# Altium PCB PCB.PcbDoc
Units mil, origin at the board's own origin, x right, y up, seen from the top; angles counter-clockwise.
Board outline 2260 x 1500 mil, 2 copper layers (Top Layer, Bottom Layer); 60 components, 52 nets, 254 pads, 182 vias.
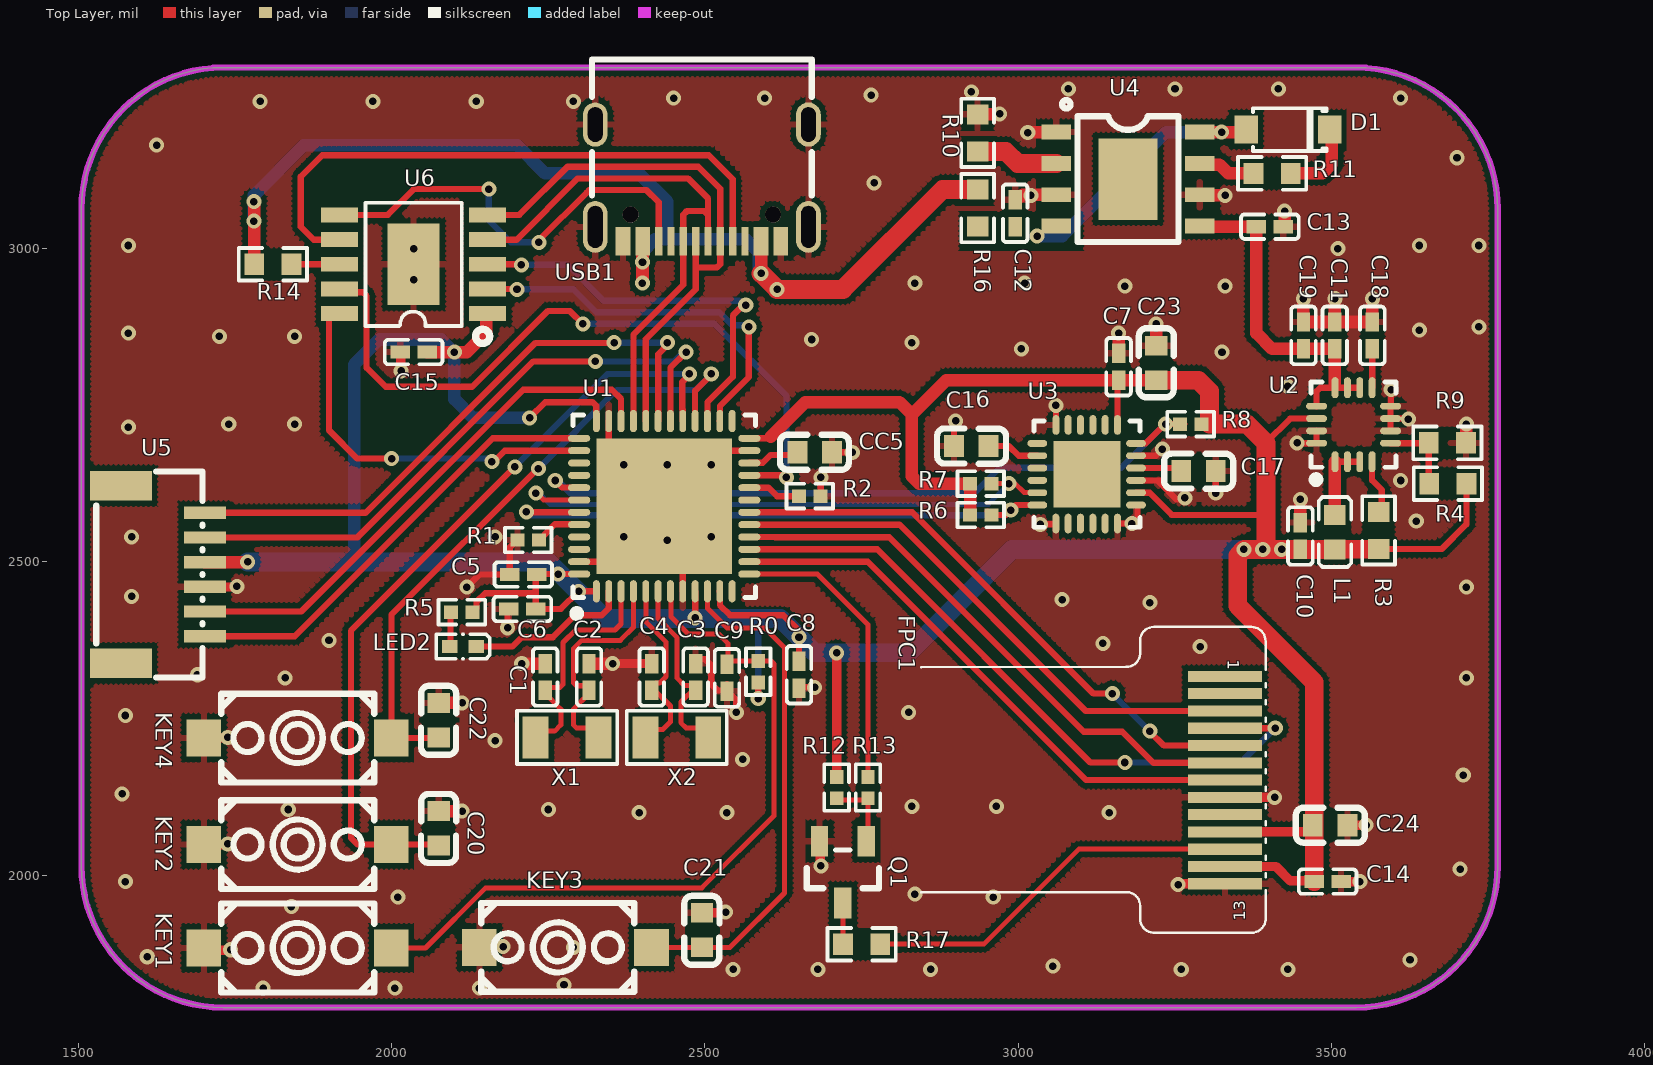
[diagram p0: Top Layer view]
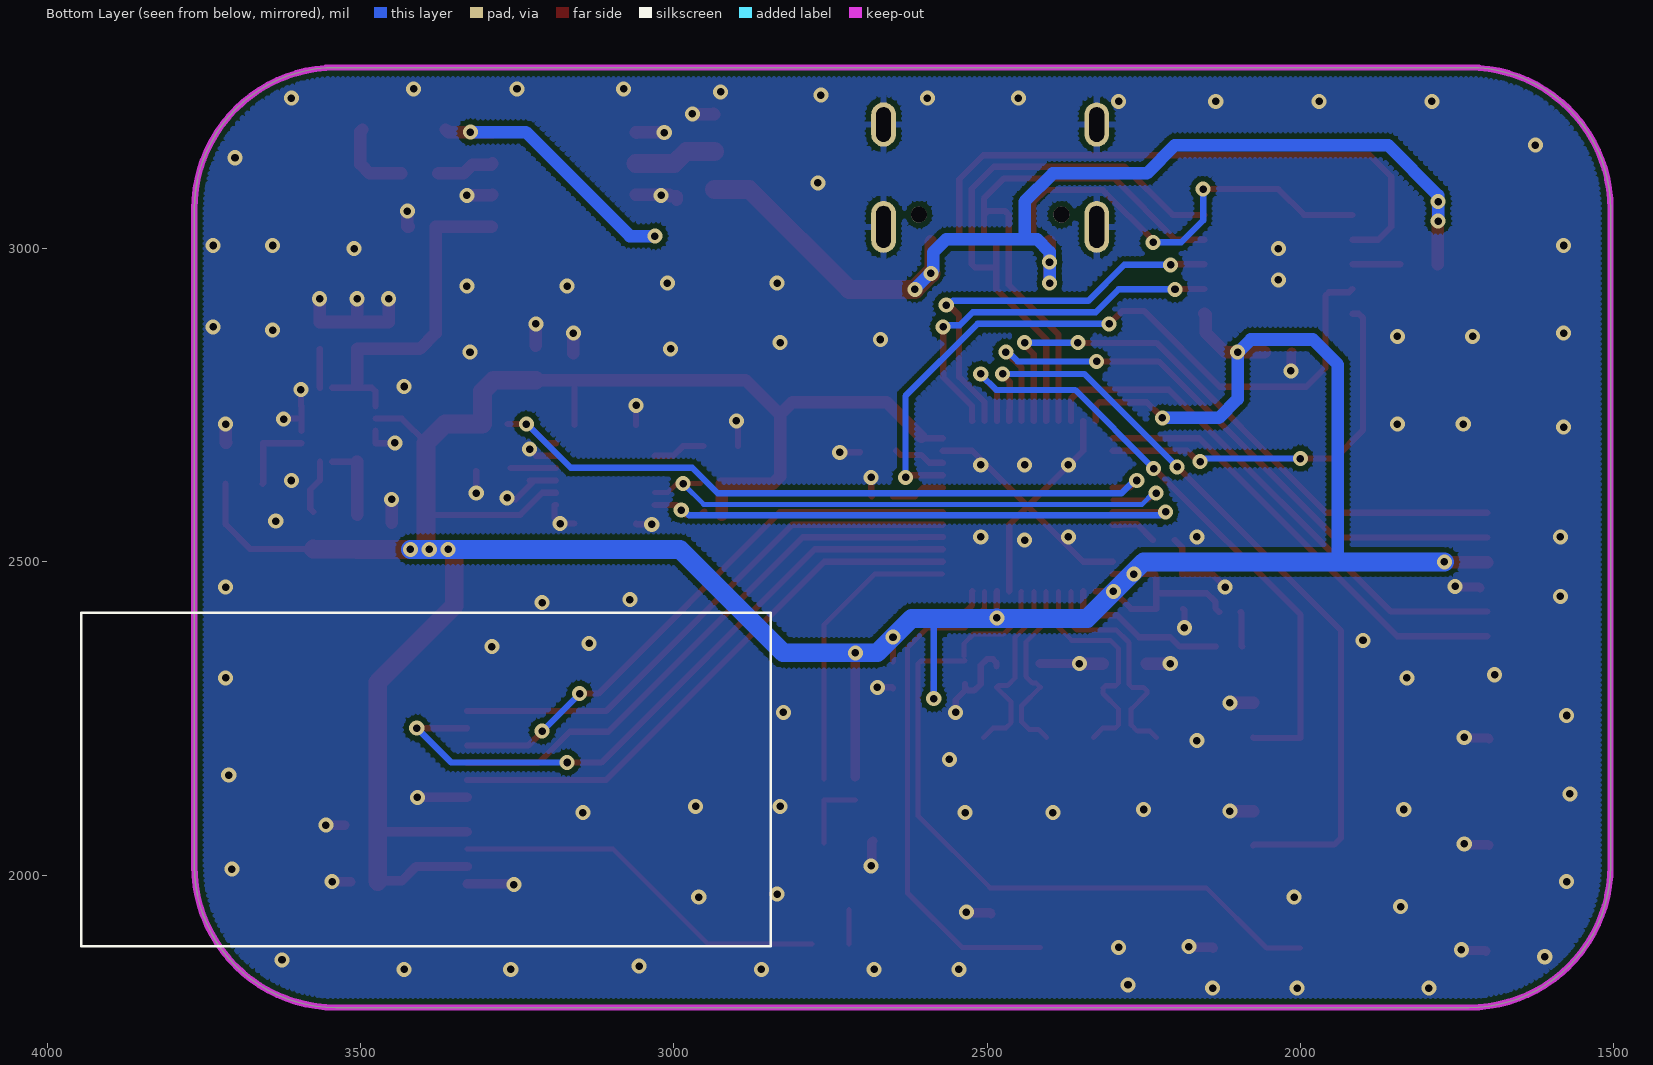
[diagram p1: Bottom Layer view, seen from below]

## Layer stack, top to bottom
Top Layer: signal copper 1.4
Dielectric: dielectric 12.6, FR-4, Dk 4.8
Bottom Layer: signal copper 1.4

## Board outline
1730.98,1789.01 cw(c1730.98,2014.99) 1505,2014.99 1505,3063.02 cw(c1730.98,3063.02) 1730.98,3289 3539.01,3289.01 cw(c3539.01,3063.02) 3765,3063.02 3765,2014.99 cw(c3539.01,2014.99) 3539.01,1789.01

## Design rules (kind name [scope] priority, off if disabled: settings)
Clearance [All] p0: scope1count=1 scope1_0_kind=Board scope1_0_value=Board scope2count=1 scope2_0_kind=Board scope2_0_value=Board commentlength=0 gap=8.5
Clearance [All] p1: gap=8.5
ComponentClearance [All] p0: scope1count=1 scope1_0_kind=Board scope1_0_value=Board scope2count=1 scope2_0_kind=Board scope2_0_value=Board commentlength=0 gap=0 collisioncheckmode=3
ComponentClearance [All] p1: gap=0 collisioncheckmode=3 verticalgap=0
DiffPairsRouting [All] p0: scope1count=1 scope1_0_kind=Board scope1_0_value=Board scope2count=1 scope2_0_kind=Board scope2_0_value=Board commentlength=0
FanoutControl Fanout_Default [All] p0: scope1count=1 scope1_0_kind=Board scope1_0_value=Board scope2count=1 scope2_0_kind=Board scope2_0_value=Board commentlength=30 // Fanout_Default (Default Rule)
FanoutControl Fanout_Small [All] p0 off: scope1count=1 scope1_0_kind=Board scope1_0_value=Board scope2count=1 scope2_0_kind=Board scope2_0_value=Board commentlength=84 // Protel DXP Scope 1 Expression Was: (CompPinCount < 5)   Fanout_Small (Default Rule)
FanoutControl Fanout_SOIC [All] p0 off: scope1count=1 scope1_0_kind=Board scope1_0_value=Board scope2count=1 scope2_0_kind=Board scope2_0_value=Board commentlength=71 // Protel DXP Scope 1 Expression Was: IsSOIC   Fanout_SOIC (Default Rule)
FanoutControl Fanout_LCC [All] p0 off: scope1count=1 scope1_0_kind=Board scope1_0_value=Board scope2count=1 scope2_0_kind=Board scope2_0_value=Board commentlength=69 // Protel DXP Scope 1 Expression Was: IsLCC   Fanout_LCC (Default Rule)
FanoutControl Fanout_BGA [All] p0 off: scope1count=1 scope1_0_kind=Board scope1_0_value=Board scope2count=1 scope2_0_kind=Board scope2_0_value=Board commentlength=69 // Protel DXP Scope 1 Expression Was: IsBGA   Fanout_BGA (Default Rule)
Height [All] p0: scope1count=1 scope1_0_kind=Board scope1_0_value=Board scope2count=1 scope2_0_kind=Board scope2_0_value=Board commentlength=0
HoleSize [All] p0: scope1count=1 scope1_0_kind=Board scope1_0_value=Board scope2count=1 scope2_0_kind=Board scope2_0_value=Board commentlength=0 absolutevalues=TRUE maxlimit=100 minlimit=1 maxpercent=80.000 minpercent=20.000
LayerPairs [All] p0: scope1count=1 scope1_0_kind=Board scope1_0_value=Board scope2count=1 scope2_0_kind=Board scope2_0_value=Board commentlength=0 enforce=TRUE
PasteMaskExpansion [All] p0: scope1count=1 scope1_0_kind=Board scope1_0_value=Board scope2count=1 scope2_0_kind=Board scope2_0_value=Board commentlength=0 expansion=0
PlaneClearance [All] p0: scope1count=1 scope1_0_kind=Board scope1_0_value=Board scope2count=1 scope2_0_kind=Board scope2_0_value=Board commentlength=0 clearance=20
PlaneConnect [All] p0: scope1count=1 scope1_0_kind=Board scope1_0_value=Board scope2count=1 scope2_0_kind=Board scope2_0_value=Board commentlength=0 planeconnectstyle=Relief reliefexpansion=20 reliefentries=4 reliefconductorwidth=10 reliefairgap=10
PolygonConnect [All] p0 off: scope1count=1 scope1_0_kind=Board scope1_0_value=Board scope2count=1 scope2_0_kind=Board scope2_0_value=Board commentlength=44 connectstyle=Direct reliefconductorwidth=10 reliefentries=4 polygonreliefangle="45 Angle" // Protel DXP Scope 1 Expression Was: ISVIA
PolygonConnect [ISVIA] p1: connectstyle=Direct reliefconductorwidth=10 reliefentries=4 polygonreliefangle="45 Angle"
RoutingCorners [All] p0: scope1count=1 scope1_0_kind=Board scope1_0_value=Board scope2count=1 scope2_0_kind=Board scope2_0_value=Board commentlength=0 cornerstyle=45-Degree minsetback=100 maxsetback=100
RoutingLayers [All] p0: scope1count=1 scope1_0_kind=Board scope1_0_value=Board scope2count=1 scope2_0_kind=Board scope2_0_value=Board commentlength=0 top layer=Automatic bottom layer=Automatic
RoutingPriority [All] p0: scope1count=1 scope1_0_kind=Board scope1_0_value=Board scope2count=1 scope2_0_kind=Board scope2_0_value=Board commentlength=0
RoutingTopology [All] p0: scope1count=1 scope1_0_kind=Board scope1_0_value=Board scope2count=1 scope2_0_kind=Board scope2_0_value=Board commentlength=0 topology=Shortest
RoutingVias [All] p0: scope1count=1 scope1_0_kind=Board scope1_0_value=Board scope2count=1 scope2_0_kind=Board scope2_0_value=Board commentlength=0 holewidth=28 width=50 viastyle="Through Hole" minholewidth=10 minwidth=10 maxholewidth=28 maxwidth=50
RoutingVias [All] p1: holewidth=28 width=50 viastyle="Through Hole" minholewidth=10 minwidth=10 maxholewidth=28 maxwidth=50
ShortCircuit [All] p0: scope1count=1 scope1_0_kind=Board scope1_0_value=Board scope2count=1 scope2_0_kind=Board scope2_0_value=Board commentlength=0 allowed=FALSE
SolderMaskExpansion [All] p0: scope1count=1 scope1_0_kind=Board scope1_0_value=Board scope2count=1 scope2_0_kind=Board scope2_0_value=Board commentlength=0 expansion=4
SolderMaskExpansion [All] p1: expansion=4
TestPointUsage FabricationTestPointUsage [All] p0: scope1count=1 scope1_0_kind=Board scope1_0_value=Board scope2count=1 scope2_0_kind=Board scope2_0_value=Board commentlength=0 valid=0 allowmultiple=FALSE
TestPointUsage FabricationTestPointUsage [All] p1: valid=0 allowmultiple=FALSE
Testpoint FabricationTestpoint [All] p0: scope1count=1 scope1_0_kind=Board scope1_0_value=Board scope2count=1 scope2_0_kind=Board scope2_0_value=Board commentlength=0 side=3 testpointundercomponent=TRUE minsize=40 maxsize=100 preferedsize=60 minholesize=0 maxholesize=40 preferedholesize=32 testpointgrid=1 style=297 order=0123456789
Testpoint FabricationTestpoint [All] p1: side=3 testpointundercomponent=TRUE minsize=40 maxsize=100 preferedsize=60 minholesize=0 maxholesize=40 preferedholesize=32 testpointgrid=1 style=297 order=0123456789
UnRoutedNet [All] p0: scope1count=1 scope1_0_kind=Board scope1_0_value=Board scope2count=1 scope2_0_kind=Board scope2_0_value=Board commentlength=0
Width [All] p0: scope1count=1 scope1_0_kind=Board scope1_0_value=Board scope2count=1 scope2_0_kind=Board scope2_0_value=Board commentlength=0 maxlimit=80 minlimit=8 preferedwidth=10
Width [All] p1: maxlimit=80 minlimit=8 preferedwidth=10
18 further rules are at their usual default settings.

## Components (designator, comment, footprint, x,y, rotation, side; value= is the part's Value field where it differs from the comment)
C1 "15pf" C0402 2245,2316.46 r90 top
C2 "15pf" C0402 2315,2316.46 r270 top
C3 "8pf" C0402 2485,2316.46 r270 top
C4 "8pf" C0402 2415,2316.46 r90 top
C5 "100NF" C0402 2210,2480 r180 top
C6 "100NF" C0402 2208.54,2425 r180 top
C7 "1UF" C0402 3160,2811.46 r90 top
C8 "10UF" C0402 2650,2320 r270 top
C9 "1UF" C0402 2535,2315 r270 top
C10 "22u" C0402 3450,2541.46 r90 top
C11 "0.1u" C0402 3505,2861.46 r90 top
C12 "10u" C0402 2995,3056.46 r270 top
C13 "10u" C0402 3401.46,3035 r180 top
C14 "1u" C0402 3493.54,1990 r0 top
C15 "1u" C0402 2035,2835 r0 top
C16 "2.2UF" C0603 2925,2685 r180 top
C17 "100NF" C0603 3287.45,2645 r180 top
C18 "3.3nf" C0402 3565,2861.46 r270 top
C19 "10u" C0402 3455,2861.46 r90 top
C20 "0.1u" C0603 2075,2075 r90 top
C21 "0.1u" C0603 2495,1912.56 r90 top
C22 "0.1u" C0603 2075,2247.55 r90 top
C23 "1NF" C0603 3220,2817.55 r270 top
C24 "1NF" C0603 3497.55,2080 r180 top
CC5 "4.7UF" C0603 2675,2675 r0 top
D1 "1N4007W" SOD-123_L2.8-W1.8-LS3.7-RD 3430,3190 r180 top
FPC1 "0.96-LCD-13PIN" 0.96LCD-13PIN 2845,2419.01 r270 top
KEY1 "K2-3.6×6.1_SMD" KEY-SMD_2P-L6.2-W3.6-LS8.0#1 1850,1884.01 r0 top
KEY2 "K2-3.6×6.1_SMD" KEY-SMD_2P-L6.2-W3.6-LS8.0#1 1850,2049.01 r180 top
KEY3 "K2-3.6×6.1_SMD" KEY-SMD_2P-L6.2-W3.6-LS8.0#2 2265,1885 r180 top
KEY4 "K2-3.6×6.1_SMD" KEY-SMD_2P-L6.2-W3.6-LS8.0#1 1850,2219.01 r180 top
L1 "1/2.2uh" L0603 3504.99,2547.45 r270 top
LED2 "SZYY0402B" LED0402-RD_BLUE 2113.81,2365 r180 top
Q1 "S8050" SOT-23-3_L2.9-W1.3-P1.90-LS2.4-TR 2720,2005 r90 top
R0 "10K" R0402 2585,2325 r90 top
R1 "10K" R0402 2217.96,2535 r180 top
R2 "10K" R0402 2667.04,2605 r0 top
R3 "100k" R0603 3575,2550.34 r90 top
R4 "125k" R0603 3685.34,2625 r0 top
R5 "10K" R0402 2112.04,2420 r180 top
R6 "10k" R0402 2940,2575 r0 top
R7 "10k" R0402 2940,2625 r0 top
R8 "10k" R0402 3275,2720 r180 top
R9 "40k" R0603 3684.66,2690 r180 top
R10 "1.1k" R0603 2935,3184.66 r90 top
R11 "1k" R0603 3405,3120 r180 top
R12 "10k" R0402 2710,2140 r90 top
R13 "1k" R0402 2760,2140 r270 top
R14 "10k" R0603 1810.35,2975 r180 top
R16 "0.4" R0603 2935,3064.66 r270 top
R17 "1k" R0603 2750,1890 r0 top
U1 "STM32F401CCU6" UFQFPN-48_L7.0-W7.0-P0.50-BL-EP 2435,2589.01 r0 top
U2 "TPS62130RGTR" QFN-16_L3.0-W3.0-P0.50-TL-EP1.7 3535,2719.01 r90 top
U3 "MPU-6050_C24112" QFN-24_L4.0-W4.0-P0.50-BL-EP2.7 3109.04,2639.99 r0 top
U4 "TP4056" ESOP-8_L4.9-W3.9-P1.27-LS6.0-BL-EP 3175,3110.99 r270 top
U5 "ZX-SH1.0-6PWT" CONN-SMD_6P-P1.00_MEGASTAR_ZX-SH1.0-6PWT 1635,2480 r270 top
U6 "CH224K_C9900042655" ESSOP-10_L4.9-W3.9-P1.00-LS6.0-BL-EP 2035,2975 r90 top
USB1 "TYPE-C16PIN" USB-C-SMD_TYPE-C16PIN 2495,3105 r180 top
X1 "32.768kHz" OSC-SMD_L3.2-W1.5 2280,2220 r0 top
X2 "25MHz" OSC-SMD_L3.2-W1.5 2455,2220 r0 top

## Footprints (in the part's own frame and the unit in brackets; to place one, negate y for a bottom-side part, rotate by r counter-clockwise, add the part's x,y. Pads: shape width x height; smd on the part's side, far side on the other; paste and mask are expansions set on the pad)
0.96LCD-13PIN [mm]
  rect 0.45x3 smd: 1(2.582,12.311) 2(3.282,12.311) 3(3.983,12.311) 4(4.683,12.311) 5(5.384,12.311) 6(6.084,12.311) 7(6.784,12.311) 8(7.485,12.311) 9(8.185,12.311) 10(8.886,12.311) 11(9.586,12.311) 12(10.286,12.311) 13(10.987,12.311)
  silkscreen extent 0.57,0 12.97,13.96
C0402 [mm]
  rect 0.79x0.54 smd: 1(-0.545,0) 2(0.545,0)
  silkscreen extent -1.17,-0.5 1.17,0.5
C0603 [mm]
  rect 0.8x0.9 smd: 1(-0.7,0) 2(0.7,0)
  silkscreen extent -1.41,-0.71 1.39,0.72
CONN-SMD_6P-P1.00_MEGASTAR_ZX-SH1.0-6PWT [mm]
  rect 0.5x1.7 smd: 1(-2.5,1.7) 2(-1.5,1.7) 3(-0.5,1.7) 4(0.5,1.7) 5(1.5,1.7) 6(2.5,1.7)
  rect 1.2x2.5 smd: 7(3.6,-1.7) 8(-3.6,-1.7)
  silkscreen extent -4.17,-2.7 4.18,1.6
ESOP-8_L4.9-W3.9-P1.27-LS6.0-BL-EP [mm]
  rect 0.6x1.2 smd: 1(-1.905,-2.908) 2(-0.635,-2.908) 3(0.635,-2.908) 4(1.905,-2.908) 5(1.905,2.908) 6(0.635,2.908) 7(-0.635,2.908) 8(-1.905,2.908)
  rect 3.3x2.4 smd: 9(0,0)
  silkscreen extent -3.2,-2.67 2.55,2.05
ESSOP-10_L4.9-W3.9-P1.00-LS6.0-BL-EP [mm]
  rect 0.6x1.5 smd: 1(-2,-3) 2(-1,-3) 3(0,-3) 4(1,-3) 5(2,-3) 6(2,3) 7(1,3) 8(0,3) 9(-1,3) 10(-2,3)
  rect 3.3x2.1 smd: 11(0,0)
  silkscreen extent -3.2,-3.08 2.5,1.95
KEY-SMD_2P-L6.2-W3.6-LS8.0#1 [mm]
  rect 1.4x1.5 smd: 1(-3.8,0) 2(3.8,0)
  silkscreen extent -3.1,-1.8 3.1,1.8
KEY-SMD_2P-L6.2-W3.6-LS8.0#2 [mm]
  rect 1.4x1.5 smd: 1(-3.8,0) 2(3.175,0)
  silkscreen extent -3.1,-1.8 3.1,1.8
L0603 [mm]
  rect 0.8x0.864 smd: 1(-0.7,0) 2(0.7,0)
  silkscreen extent -1.42,-0.65 1.41,0.67
LED0402-RD_BLUE [mm]
  rect 0.636x0.54 smd: 1(-0.538,0) 2(0.538,0)
  silkscreen extent -1.09,-0.54 1.09,0.54
OSC-SMD_L3.2-W1.5 [mm]
  rect 1.05x1.7 smd: 1(-1.275,0) 2(1.275,0)
  silkscreen extent -2.03,-1.08 2.03,1.08
QFN-16_L3.0-W3.0-P0.50-TL-EP1.7 [mm]
  oval 0.85x0.28 smd: 1(-1.5,0.75) 2(-1.5,0.25) 3(-1.5,-0.25) 4(-1.5,-0.75) 9(1.5,-0.75) 10(1.5,-0.25) 11(1.5,0.25) 12(1.5,0.75)
  oval 0.28x0.85 smd: 5(-0.75,-1.5) 6(-0.25,-1.5) 7(0.25,-1.5) 8(0.75,-1.5) 13(0.75,1.5) 14(0.25,1.5) 15(-0.25,1.5) 16(-0.75,1.5)
  silkscreen extent -2.38,-1.72 1.72,1.73
QFN-24_L4.0-W4.0-P0.50-BL-EP2.7 [mm]
  oval 0.28x0.8 smd: 1(-1.25,-2) 2(-0.75,-2) 3(-0.25,-2) 4(0.25,-2) 5(0.75,-2) 6(1.25,-2) 13(1.25,2) 14(0.75,2) 15(0.25,2) 16(-0.25,2) 17(-0.75,2) 18(-1.242,2)
  oval 0.8x0.28 smd: 7(2,-1.25) 8(2,-0.75) 9(2,-0.25) 10(2,0.25) 11(2,0.75) 12(2,1.25) 19(-2,1.25) 20(-2,0.75) 21(-2,0.25) 22(-2,-0.25) 23(-2,-0.75) 24(-2,-1.25)
  rect 2.7x2.7 smd: 25(0.012,0)
  silkscreen extent -2.14,-2.15 2.16,2.15
R0402 [mm]
  rect 0.566x0.54 smd: 1(-0.433,0) 2(0.433,0)
  silkscreen extent -0.94,-0.5 0.94,0.5
R0603 [mil]
  rect 31.75x34.02 smd: 1(-29.65,0) 2(29.66,0)
  silkscreen extent -55,-26 55,26
SOD-123_L2.8-W1.8-LS3.7-RD [mm]
  rect 0.95x1.15 smd: 1(-1.693,0) 2(1.693,0)
  silkscreen extent -1.58,-0.87 1.41,0.87
SOT-23-3_L2.9-W1.3-P1.90-LS2.4-TR [mm]
  rect 1.25x0.7 smd: 1(1.25,0.95) 2(1.25,-0.95) 3(-1.25,0)
  silkscreen extent -0.65,-1.46 0.9,1.46
UFQFPN-48_L7.0-W7.0-P0.50-BL-EP [mm]
  oval 0.28x0.9 smd: 1(-2.751,-3.449) 2(-2.25,-3.449) 3(-1.75,-3.449) 4(-1.25,-3.449) 5(-0.749,-3.449) 6(-0.249,-3.449) 7(0.249,-3.449) 8(0.749,-3.449) 9(1.25,-3.449) 10(1.75,-3.449) 11(2.251,-3.449) 12(2.751,-3.449) 25(2.751,3.449) 26(2.251,3.449) 27(1.75,3.449) 28(1.25,3.449) 29(0.749,3.449) 30(0.249,3.449) 31(-0.249,3.449) 32(-0.749,3.449) 33(-1.25,3.449) 34(-1.75,3.449) 35(-2.25,3.449) 36(-2.751,3.449)
  oval 0.9x0.28 smd: 13(3.449,-2.751) 14(3.449,-2.25) 15(3.449,-1.75) 16(3.449,-1.25) 17(3.449,-0.749) 18(3.449,-0.249) 19(3.449,0.249) 20(3.449,0.749) 21(3.449,1.25) 22(3.449,1.75) 23(3.449,2.25) 24(3.449,2.751) 37(-3.449,2.751) 38(-3.449,2.25) 39(-3.449,1.75) 40(-3.449,1.25) 41(-3.449,0.749) 42(-3.449,0.249) 43(-3.449,-0.249) 44(-3.449,-0.749) 45(-3.449,-1.25) 46(-3.449,-1.75) 47(-3.449,-2.25) 48(-3.449,-2.751)
  rect 5.5x5.5 smd: 49(0,0)
  silkscreen extent -3.7,-4.5 3.7,3.7
USB-C-SMD_TYPE-C16PIN [mm]
  oval 1x2.1 hole 0.6 slot 1.7 at 90 deg: 1(-4.32,1.787) 2(4.32,1.787)
  oval 1x1.8 hole 0.6 slot 1.4 at 90 deg: 3(-4.32,-2.362) 4(4.32,-2.362)
  rect 0.6x1.15 smd: A1B12(-3.2,2.362) A4B9(-2.4,2.362) B1A12(3.2,2.362) B4A9(2.4,2.362)
  rect 0.3x1.15 smd: A5(-1.25,2.362) A6(-0.25,2.362) A7(0.25,2.362) A8(-1.75,2.362) B5(1.75,2.362) B6(0.75,2.362) B7(-0.75,2.362) B8(1.25,2.362)
  round 0.65 hole 0.65 unplated: ""(-2.89,1.288) ""(2.89,1.288)
  silkscreen extent -4.45,-5 4.45,0.52

## Via types
v1: diameter 24, hole 12, Top Layer to Bottom Layer, tented both sides, 182 vias

## Nets (pads, with @x,y where several pads share a name; then routed paths per layer and width w, separated by ;. In a path a pad name is that pad's centre, name@x,y a point inside that pad or via, vN(x,y) a via of type N, cw(c..) or ccw(c..) an arc to the next point about the centre after c; other vN are vias at no path point)
3.3V: C5.1 C6.1 C7.1 C8.1 C10.1 C14.1 C15.2 C23.2 C24.2 FPC1.10 FPC1.12 L1.2 R0.1 R3.1 R4.2 R5.1 R6.1 R7.1 R8.1 R12.2 U1.1 U1.9 U1.11 U1.24 U1.36 U1.48 U2.14 U3.8 U3.13 U5.3 U6.1 | length 6913.7
  Top Layer w10: R5.1 2129.59,2420 2135.22,2425.63 2135.22,2436.09 2149.13,2450 2230,2450 ; v1(2220,2730) 2245,2755 2320.65,2755 2326.51,2749.14 2326.51,2725 U1.36 ; C5.1 2232.17,2480.71 v1(2265.69,2480.71) U1.48 ; C5.1@2235,2480 2230,2475 2230,2450 ; U1.1 v1(2298.2,2453.2) 2270,2425 C6.1 2230,2450 ; U1.9 2484.4,2453.01 v1(2484.4,2410.6) ; U1.11 2523.8,2453.01 2523.8,2431.2 2540,2415 2625,2415 v1@2650,2390 ; U1.24 2602.31,2697.31 2605,2700 ; v1(2585,2282.04) R0.1 ; C8.1 v1(2650,2380) ; U3.13 3158.26,2788.26 C7.1 ; U3.8 3187.98,2610.27 3209.73,2610.27 3245,2575 3395,2575 ; 3395,2690 3433.85,2728.85 U2.14 ; R3.1 3675.69,2520.69 3715,2560 R4.2
  Top Layer w15: R12.2 v1(2710,2355) ; FPC1.12 3410.97,2014.03 3434.03,1990.97 3471.11,1990.97 C14.1 ; FPC1.10 3461.15,2069.18 3471.97,2080 C24.2@3472.08,2080
  Top Layer w20: U5.3 1702.09,2499.84 1769.84,2499.84 v1(1770,2500) ; C15.2 v1(2100,2835) 2120,2835 2151.16,2866.16 2151.16,2894.45 2152.98,2896.26 U6.1 ; 2605,2700 2660,2755 2810,2755 2830,2735 ; R6.1 R7.1 2841.72,2625 2830,2636.72 2830,2735 ; C23.2 C7.1 2885,2790 2830,2735
  Top Layer w30: C23.2 3287.43,2790 3305,2772.43 3305,2720 3365,2720 3395,2690 3395,2575 3395,2525 v1(3390,2520) ; C10.1@3454.37,2519.95 3504.95,2519.95 L1.2 ; C14.1 3472.08,2080 3472.08,2307.92 3350,2430 3350,2510 v1(3360,2520) v1(3390,2520) ; R3.1 3574.66,2520.34 3450.34,2520.34 C10.1 v1(3390,2520)
  Bottom Layer w10: v1@2585,2290 2585,2405 2590,2410
  Bottom Layer w20: 1940,2500 1940,2815 1980,2855 2078.92,2855 2098.92,2835 v1(2100,2835) 2100,2760 2130,2730 v1(2220,2730)
  Bottom Layer w30: v1(1770,2500) 1940,2500 2250,2500 2340,2410 2483.81,2410 v1(2484.4,2410.6) 2485,2410 2590,2410 2620,2410 2675,2355 v1(2710,2355) 2825,2355 2990,2520 v1(3420,2520)
3.7V: C11.1 C13.2 C19.1 U2.10 U2.11 U2.12 U2.13 U4.5 | length 545
  Top Layer w10: U2.13 3475.94,2772.21 3481.8,2778.07 U2.11 U2.10
  Top Layer w20: U4.5@3290.49,3035 C13.2 3380,2865 3405,2840 C19.1 C11.1 3505.23,2839.77 U2.12@3505.23,2785
BOOT0: R1.1 U1.44 | length 74.8
  Top Layer w10: R1.1 2235.51,2535 2260.51,2560 2286.23,2560 2286.73,2559.51 U1.44
BOOT1: R2.1 U1.20 | length 84.8
  Top Layer w10: U1.20 2601.49,2618.51 2615,2605 R2.1
C12_2: C12.2 D1.2 R16.2 U4.4 U4.8 | length 438.7
  Top Layer w20: U4.8 v1(3324.43,3185.99) 3359.36,3185.99 D1.2
  Bottom Layer w20: v1(3030,3020) 3070,3020 3235.99,3185.99 v1(3324.43,3185.99)
CC1: U6.7 USB1.A5 | length 968.4
  Top Layer w10: U6.7 1875.63,3014.37 1855,3035 1855,3115 1889.07,3149.07 2505.93,3149.07 2544.22,3110.78 USB1.A5
CC2: U6.6 USB1.B5 | length 697.4
  Top Layer w10: U6.6 1993.74,3053.74 2035,3095 v1(2155,3095) ; v1(2235,3010) 2235,3013.29 2311.17,3089.46 2315.28,3093.57 2406.43,3093.57 2426.11,3073.89 USB1.B5
  Bottom Layer w10: v1(2155,3095) 2155,3045 2190,3010 v1(2235,3010)
CFG1: U1.21 U6.9 | length 1141.6
  Top Layer w10: U6.9 1922.19,2930.33 1954.14,2930.33 1960,2924.47 1960,2810 1990.5,2779.5 2128.34,2779.5 2249.34,2900.5 2284.5,2900.5 v1(2305,2880) ; U1.21 2623,2638.21 2626.21,2635 v1(2630,2635)
  Bottom Layer w10: v1(2305,2880) 2515,2880 2630,2765 v1(2630,2635)
CFG2: U1.26 U6.2 | length 610.5
  Top Layer w10: U6.2 v1@2199.37,2935.63 ; U1.26 2523.8,2725 2523.8,2748.8 2570,2795 v1(2570,2875)
  Bottom Layer w10: v1(2200,2935) 2290,2935 2326.5,2898.5 2522.66,2898.5 2543.48,2877.68 2567.32,2877.68 v1(2570,2875)
CFG3: U1.27 U6.3 | length 649.3
  Top Layer w10: U6.3 v1@2205,2975 ; U1.27 2503.91,2755.07 2544.5,2795.66 2544.5,2893.29 2561.21,2910 v1(2565,2910)
  Bottom Layer w10: v1(2206.85,2974.09) 2280.91,2974.09 2338,2917 2554.21,2917 2561.21,2910 v1(2565,2910)
D1_1: D1.1 R11.1 | length 128
  Top Layer w20: R11.1 3485,3120 3500,3135 3500,3186.63 D1.1
GND: C1.2 C2.1 C3.1 C4.2 C5.2 C6.2 C7.2 C8.2 C9.2 C10.2 C11.2 C12.1 C13.1 C14.2 C15.1 C16.2 C17.1 C18.1 C19.2 C20.2 C21.2 C22.2 C23.1 C24.1 CC5.2 FPC1.8 FPC1.13 KEY1.1 KEY2.2 KEY3.2 KEY4.2 Q1.1 R1.2 R2.2 R9.1 R10.2 U1.8 U1.23 U1.35 U1.47 U1.49 U2.6 U2.7 U2.8 U2.15 U2.16 U3.1 U3.6 U3.7 U3.9 U3.11 U3.18 U4.1 U4.3 U4.6 U5.4 U6.11 USB1.1 USB1.2 USB1.3 USB1.4 USB1.A1B12 USB1.B1A12 | length 2863.4
  Top Layer w10: v1(2120,2460) 2140,2480 C5.2 2188.54,2523.13 2200.41,2535 R1.2 ; v1(2185,2395) 2185,2422.92 C6.2 ; U1.47 2346.41,2500.41 U1.49 ; U1.35 2346.41,2677.61 U1.49 ; U1.8 2464.51,2559.51 U1.49 ; C3.1@2485,2332.99 C3.1 2485,2339.37 2490.63,2345 2500,2345 2510,2335 2510,2305 2520,2295 2530,2295 C9.2@2535,2300 ; C9.2@2535,2304.92 C9.2@2535,2300 ; v1(2550,2260) 2550,2280.08 2535,2295.08 C9.2@2535,2300 ; U1.23 2523.61,2677.61 U1.49 ; C8.2 2651.46,2300 v1(2675,2300) ; R2.2 2684.54,2605.46 2684.54,2634.54 v1(2685,2635) ; CC5.2 v1(2735,2675) ; C16.2 2897.45,2722.45 v1(2900,2725) ; v1(3035,2560) 3059.37,2560 3059.84,2560.47 U3.1 ; v1(3060,2750) 3060.15,2749.85 U3.18 ; U3.6 v1(3181.25,2561.25) 3190,2570 3190,2590.32 3189.53,2590.79 U3.7 ; U3.9 3221.83,2630.16 ; U3.11 3219.53,2669.53 v1(3230,2680) ; 3229.84,2630.16 3221.83,2630.16 ; v1@3265,2600 3251.98,2600 3221.83,2630.16 ; v1(3315,2610) C17.1 ; v1(3445,2690) 3445.52,2689.48 U2.16 U2.15 ; U2.6 U2.7 ; v1(3595,2775) 3594.52,2774.52 3594.52,2749.01 3594.05,2748.54 U2.7 ; v1@3621.15,2728.85 U2.7
  Top Layer w15: KEY2.2@1699.2,2047.81 KEY2.2 1737.2,2049.01 v1(1738.4,2050.21) ; KEY4.2@1699.2,2217.81 KEY4.2 1737.2,2219.01 v1(1738.4,2220.21) ; KEY1.1@1703.8,1878.8 1705,1880 1741.8,1880 v1(1743,1881.2) ; U5.4@1713.8,2458.8 1715,2460 1751.8,2460 v1(1753,2461.2) ; C15.1@2013.8,2835 2013.8,2834.74 2014.27,2834.27 2014.27,2805.73 v1(2015,2805) ; KEY3.2@2138.8,1883.8 KEY3.2 2176.8,1885 v1(2178,1886.2) ; v1(2352.45,2337.92) C4.2 ; C21.2@2493.8,1938.91 C21.2 2531.8,1940.11 v1(2533,1941.31) ; Q1.1 2683.8,2053 2683.8,2016.2 v1(2685,2015) ; v1(3255,1985) 3256.46,1986.46 FPC1.13 ; FPC1.8 v1@3409.33,2124.33 ; C14.2 v1(3545,1990) ; C24.1 v1(3555,2080)
  Top Layer w20: C20.2 v1(2112.45,2102.55) ; C22.2 v1(2112.45,2275.11) ; v1(2207.55,2337.92) C1.2 ; C2.1 v1(2352.45,2337.92) ; R10.2 R10.2@2935.34,3214.66 ; R10.2@2935.69,3215 R10.2@2935.34,3214.66 ; v1(2970,3215) 2969.66,3214.66 R10.2@2935.34,3214.66 ; C12.1 2995,3082.84 2995.63,3083.47 3004.82,3083.47 3007.35,3085.99 U4.3 ; v1(3015,3185) 3015.5,3185.5 U4.1@3060,3185.5 ; U4.1@3059.51,3185 U4.1@3060,3185.5 ; U4.1 U4.1@3060,3185.5 ; C7.2 v1(3160,2865) ; C23.1 v1@3220,2875 ; U4.6 3289.99,3085.5 3329.5,3085.5 v1(3330,3085) ; C13.1 3424.37,3035 3425,3035.63 v1(3425,3060) ; C10.2 v1(3450,2600) ; v1(3455,2920) C19.2 C11.2 ; v1(3505,2920) C11.2 ; v1(3565,2920) C18.1 C11.2 ; R9.1 3714.66,2690.34 3714.66,2719.66 v1(3715,2720)
  other v1: 1795,1820 2005,1820 2140,1820 2275,1825 2545,1850 2680,1850 2860,1850 3260,1850 3430,1850 3055,1855 3625,1865 1610,1870 2290,1885 1840,1950 2010,1965 2960,1965 2835,1970 1575,1990 3705,2010 2395,2100 2535,2100 3145,2100 1835,2105 2250,2105 2830,2110 2965,2110 3409.13,2124.16 1570,2130 3710,2160 2560,2185 2165,2215 1575,2255 2825,2260 1830,2315 3715,2315 1690,2320 3290,2365 3135,2370 1900,2375 3210,2435 3070,2440 1585,2445 3715,2460 2440,2535 1585,2540 2165,2540 2370,2540 2510,2540 3635,2565 3265.68,2602.27 3610,2630 2370,2655 2440,2655 2510,2655 1580,2715 1740,2720 1845,2720 3622.43,2728.1 3430,2780 3325,2835 3005,2840 2830,2850 2670,2855 1725,2860 1845,2860 1580,2865 3640,2870 3735,2875 3220,2880 3170,2940 3330,2940 2835,2945 3010,2945 2035,2950 2035,3000 3510,3000 1580,3005 3640,3005 3735,3005 3020,3085 2770,3105 3700,3145 1625,3165 1790,3235 1970,3235 2135,3235 2290,3235 2450,3240 2595,3240 3610,3240 2765,3245 2925,3250 3080,3255 3250,3255 3415,3255
KEY_1: C20.1 KEY2.1 U1.29 | length 1265.1
  Top Layer w10: C20.1 2073.44,2049.01 KEY2.1 1945.99,2049.01 1935,2060 1935,2390 v1(2196.68,2651.68) ; U1.29 2464.31,2725 2464.31,2743.04 2463.82,2743.53 2463.82,2763.82 2463.82,2787.14 2475,2798.32 v1(2475,2800)
  Bottom Layer w10: v1(2196.68,2651.68) 2345,2800 v1(2475,2800)
KEY_2: C21.1 KEY3.1 U1.10 | length 815.7
  Top Layer w8: KEY3.1 C21.1 2540,1885 2626.87,1971.87 2626.87,2363.13 2595,2395 2535,2395 2503.91,2426.09 U1.10
KEY_3: C22.1 KEY4.1 U1.28 | length 1028.6
  Top Layer w10: C22.1 2074.01,2219.01 KEY4.1 1999.61,2415.67 2233.01,2649.07 v1(2234.07,2649.07) ; U1.28 2484.21,2773.15 2510,2798.94 v1(2510,2800)
  Bottom Layer w10: v1(2234.07,2649.07) 2359.5,2774.5 2485.56,2774.5 2510,2798.94 v1(2510,2800)
LCD_BLK: R13.1 U1.13 | length 469.2
  Top Layer w8: U1.13 2679.29,2480.71 2760,2400 R13.1@2760,2153.43
LCD_CS: FPC1.7 U1.14 | length 903.2
  Top Layer w10: U1.14 2759.59,2500.41 3108.09,2151.91 FPC1.7
LCD_DC: FPC1.5 U1.18 | length 913.4
  Top Layer w10: U1.18 2830.79,2579.21 3120,2290 v1(3150,2290) ; v1(3210,2230) 3210,2229.37 3232.31,2207.06 FPC1.5
  Bottom Layer w10: v1(3150,2290) v1(3210,2230)
LCD_LEDK: FPC1.11 R17.2 | length 612.8
  Top Layer w8: R17.2 2945,1890 3096.61,2041.61 FPC1.11
LCD_RES: FPC1.6 U1.16 | length 908.1
  Top Layer w10: U1.16 2611.7,2539.81 2612.01,2539.5 2794,2539.5 3104.25,2229.25 3165.75,2229.25 3215.52,2179.48 FPC1.6
LCD_SCL: FPC1.4 U1.15 | length 1082.8
  Top Layer w10: U1.15 2774.89,2520.11 3115,2180 v1(3170,2180) ; FPC1.4 v1@3409.63,2234.63
  Bottom Layer w10: v1(3170,2180) 3355,2180 v1(3410,2235)
LCD_SDA: FPC1.3 U1.17 | length 882
  Top Layer w10: U1.17 2810.49,2559.51 3107.79,2262.21 FPC1.3
LED: LED2.1 U1.2 | length 263.6
  Top Layer w10: LED2.1 2192.44,2365 2207.44,2380 2257.35,2380 2292.35,2415 2335,2415 2346.21,2426.21 2346.21,2453.01 U1.2
MPU_INT: R8.2 U1.41 U3.12 | length 1161.1
  Top Layer w10: v1(2261.06,2630) 2272.36,2618.7 2299.01,2618.7 U1.41 ; U3.12 3187.98,2689.4 3203.34,2689.4 3233.94,2720 v1(3235,2720) R8.2 R8.2@3265,2720
  Bottom Layer w10: v1(2261.06,2630) 2264.85,2630 2285.35,2609.5 2929.5,2609.5 2970.5,2650.5 3164.44,2650.5 3233.94,2720 v1(3235,2720)
MPU_SCL: R7.2 U1.42 U3.23 | length 929.2
  Top Layer w8: v1(2230,2610) 2231.49,2610 2242.69,2598.81 U1.42 ; R7.2 v1(2985,2625) 2995,2625 3008.95,2611.05 3029.72,2611.05 U3.23
  Bottom Layer w8: v1(2230,2610) 2234.33,2610 2252.33,2592 2952,2592 v1(2985,2625)
MPU_SDA: R6.2 U1.43 U3.24 | length 951.4
  Top Layer w10: v1(2215,2580) 2215.6,2579.4 2299.01,2579.4 U1.43 ; R6.2@2950.91,2580.63 2956.53,2575 R6.2 2980,2575 v1(2987.89,2582.89) 2995.79,2590.79 U3.24
  Bottom Layer w10: v1(2215,2580) 2218.79,2580 2224.29,2574.5 2975.71,2574.5 2984.11,2582.89 v1(2987.89,2582.89)
NRST: C9.1 KEY1.2 R0.2 U1.7 | length 1186.9
  Top Layer w8: KEY1.2 2054.01,1884.01 2150,1980 2495,1980 2610,2095 2610,2337.35 2605.31,2342.04 2535.88,2342.04 C9.1@2535,2342.92 ; U1.7 2445.39,2452.62 2445.39,2412.95 2473.33,2385 2521.67,2385 2536.46,2370.21 C9.1@2536.46,2350
PCI4: C1.1 U1.3 X1.1 | length 370.1
  Top Layer w8: X1.1 2239.8,2230 2260,2230 2270,2240 2270,2265.08 2245,2290.08 C1.1 2249.92,2299.92 2268.81,2299.92 2273.5,2304.61 2273.5,2371.4 2293.6,2391.5 2356.5,2391.5 2366.11,2401.11 U1.3
PCI5: C2.2 U1.4 X1.2 | length 364.3
  Top Layer w8: C2.2 2315,2290.08 2290,2265.08 2290,2240 2294.69,2235.31 2314.88,2235.31 X1.2 ; C2.2@2315,2298.54 2311.08,2302.46 2294.69,2302.46 2290,2307.15 2290,2361.73 2303.27,2375 2365,2375 2385.81,2395.81 U1.4
PG: U1.38 U6.10 | length 626.4
  Top Layer w10: U6.10 1906.81,2896.26 1900,2889.45 1900,2710 1945,2665 v1(2000,2665) ; v1(2160,2660) 2162.97,2660 2180.58,2677.61 U1.38
  Bottom Layer w10: v1(2000,2665) 2151.21,2665 2156.21,2660 v1(2160,2660)
PH0: C4.1 U1.5 X2.1 | length 297.8
  Top Layer w8: X2.1 2417.59,2232.79 2432.79,2232.79 2445,2245 2445,2270.08 2415,2300.08 2421.48,2306.55 2427.5,2306.55 2438.13,2317.19 2438.13,2327.19 2438.13,2371.87 2405.51,2404.49 U1.5
PH1: C3.2 U1.6 X2.2 | length 306.3
  Top Layer w8: U1.6 2425.21,2409.79 2455,2380 2455,2315 2467.06,2302.94 2481.98,2302.94 C3.2@2484.85,2300.08 ; C3.2@2485,2300.08 2461.5,2276.58 2461.5,2243.5 2470,2235 2490.2,2235 X2.2
Q1_2: Q1.2 R12.1 R13.2 | length 118.9
  Top Layer w8: R12.1@2710,2120 2730,2120 2730.46,2120.46 2760,2120.46 Q1.2@2760,2051.8
Q1_3: Q1.3 R17.1 | length 55.8
  Top Layer w8: Q1.3@2719.9,1945.64 2720.34,1945.19 R17.1
R5_2: LED2.2 R5.2 | length 56
  Top Layer w10: LED2.2 2093.81,2366.19 2093.81,2418.81 R5.2
R10_1: R10.1 U4.2 | length 133.4
  Top Layer w30: R10.1 2980,3155 2999.01,3135.99 U4.2
R11_2: R11.2 U4.7 | length 92.5
  Top Layer w20: U4.7 3291.31,3134.18 3320.82,3134.18 3335,3120 R11.2
RXD: U1.31 U5.1 | length 981.9
  Top Layer w10: U5.1 1958.42,2578.42 2229.5,2849.5 2354.5,2849.5 v1(2355,2850) ; U1.31 2425.21,2831.42 2440,2846.21 v1(2440,2850)
  Bottom Layer w10: v1(2355,2850) v1(2440,2850)
SW_CLK: U1.37 U5.6 | length 728.1
  Top Layer w10: U5.6 1845.51,2381.57 2161.25,2697.31 U1.37
SW_DIO: U1.34 U5.5 | length 852.2
  Top Layer w10: U5.5 1855.94,2420.94 2210,2775 2351.06,2775 2365.91,2760.15 2365.91,2725 U1.34
TXD: U1.30 U5.2 | length 1011.3
  Top Layer w10: U5.2 1945.21,2539.05 2226.16,2820 v1(2325,2820) ; U1.30 2444.81,2809.81 v1(2470,2835)
  Bottom Layer w10: v1(2325,2820) 2451.21,2820 2466.21,2835 v1(2470,2835)
U2_1: L1.1 U2.1 U2.2 U2.3 | length 124.5
  Top Layer w10: U2.1 U2.2 U2.3
  Top Layer w20: L1.1 3505.23,2575.23 3505.23,2659.72 U2.1
U2_4: R3.2 U2.4 | length 88.4
  Top Layer w10: U2.4 3564.53,2630.47 3580,2615 3580,2585 R3.2
U2_5: R4.1 R9.2 U2.5 | length 126.5
  Top Layer w10: U2.5 3654.48,2689.48 R9.2 3655,2625.69 R4.1
U2_9: C18.2 U2.9 | length 62.1
  Top Layer w10: U2.9 3564.72,2778.26 3564.72,2839.72 C18.2
U3_10: C17.2 U3.10 | length 72.3
  Top Layer w10: U3.10 3259.84,2649.84 C17.2@3260,2650
U3_20: C16.1 U3.20 | length 84.1
  Top Layer w10: C16.1 2985,2685 3000.47,2669.53 U3.20
U6_8: R14.1 U6.8 | length 76.9
  Top Layer w10: R14.1 U6.8
USB+: U1.33 U6.4 USB1.A6 USB1.B6 | length 880.2
  Top Layer w10: U6.4 2199.37,3014.37 2297.07,3112.07 2472.93,3112.07 2504.84,3080.16 2504.84,3054.14 ; U1.33 2385.81,2862.75 2465.47,2942.41 USB1.B6 2465.47,3054.14 2471.33,3060 2498.99,3060 2504.84,3054.14 ; USB1.A6 2504.84,3054.14
USB-: U1.32 U6.5 USB1.A7 USB1.B7 | length 899.6
  Top Layer w10: U6.5 2203.74,3053.74 2280.57,3130.57 2489.43,3130.57 2524.53,3095.47 USB1.B7 2524.25,3011.71 2524.25,2975.11 2519.14,2970 2485.16,2970 ; U1.32 2405.51,2855.51 2485.16,2935.16 2485.16,2970 ; USB1.A7 2485.16,2970
VCAP1: CC5.1 U1.22 | length 82.3
  Top Layer w10: U1.22 2571,2658.1 2592.04,2658.1 2604.44,2670.5 2637.95,2670.5 CC5.1@2645,2677.55
VCC: R14.2 R16.1 USB1.A4B9 USB1.B4A9 | length 1796.1
  Top Layer w20: R14.2 v1@1780.69,3075 ; v1(2400,2945) 2400.26,2945.26 v1(2400.26,2978.49) 2400.26,3011.73 USB1.B4A9 ; v1(2589.49,2960.51) USB1.A4B9
  Top Layer w30: v1(2589.49,2960.51) v1(2615,2935) 2720,2935 2879.31,3094.31 R16.1
  Bottom Layer w20: v1(1780,3044.02) v1(1780,3075) 1780,3085 1860,3165 2200,3165 2245,3120 2395,3120 2440,3075 2440,3015 ; v1(2400,2945) 2400,2995 2420,3015 2440,3015 ; v1(2615,2935) 2615,2936.08 2585.95,2965.13 2585.95,2994.05 2565,3015 2440,3015
pads on no net: FPC1.1 FPC1.2 FPC1.9 U1.12 U1.19 U1.25 U1.39 U1.40 U1.45 U1.46 U3.2 U3.3 U3.4 U3.5 U3.14 U3.15 U3.16 U3.17 U3.19 U3.21 U3.22 U3.25 U4.9 U5.7 U5.8 USB1. USB1.A8 USB1.B8

## Polygon pours and split planes (outlines as drawn)
GND on Top Layer "GND_L01_P001" (hatched 90Degree grid 8 track 8, remove dead copper, pour order 1): 1735.99,1790 cw(c1735.99,2015.98) 1510,2015.98 1510,3064.01 cw(c1735.99,3064.01) 1735.99,3290 3544.01,3290 cw(c3544.01,3064.01) 3770,3064.01 3770,2015.98 cw(c3544.01,2015.98) 3544.01,1790
GND on Bottom Layer "GND_L02_P000" (hatched 90Degree grid 8 track 8, remove dead copper, pour order 0): 1730.98,1789.01 cw(c1730.98,2014.99) 1505,2014.99 1505,3063.02 cw(c1730.98,3063.02) 1730.98,3289 3539.01,3289.01 cw(c3539.01,3063.02) 3765,3063.02 3765,2014.99 cw(c3539.01,2014.99) 3539.01,1789.01

## Keep-outs
Keep-Out Layer:
  the board outline again, w10

## Text inside footprints (layer, text, board x,y; h text height)
FPC1: Top Overlay "13" at 3368.34,1927.12 h31.5 r90; Top Overlay "1" at 3327.82,2343.8 h31.5 r270